# Altium PCB PCBV2-01.PcbDoc (part 2 of 2)
Units mm, origin at the board's own origin, x right, y up, seen from the top; angles counter-clockwise.
Board outline 152.4 x 101.6 mm, 2 copper layers (Top Layer, Bottom Layer); 97 components, 117 nets, 452 pads, 185 vias.
Unrouted connection lines stored in the file: 1.
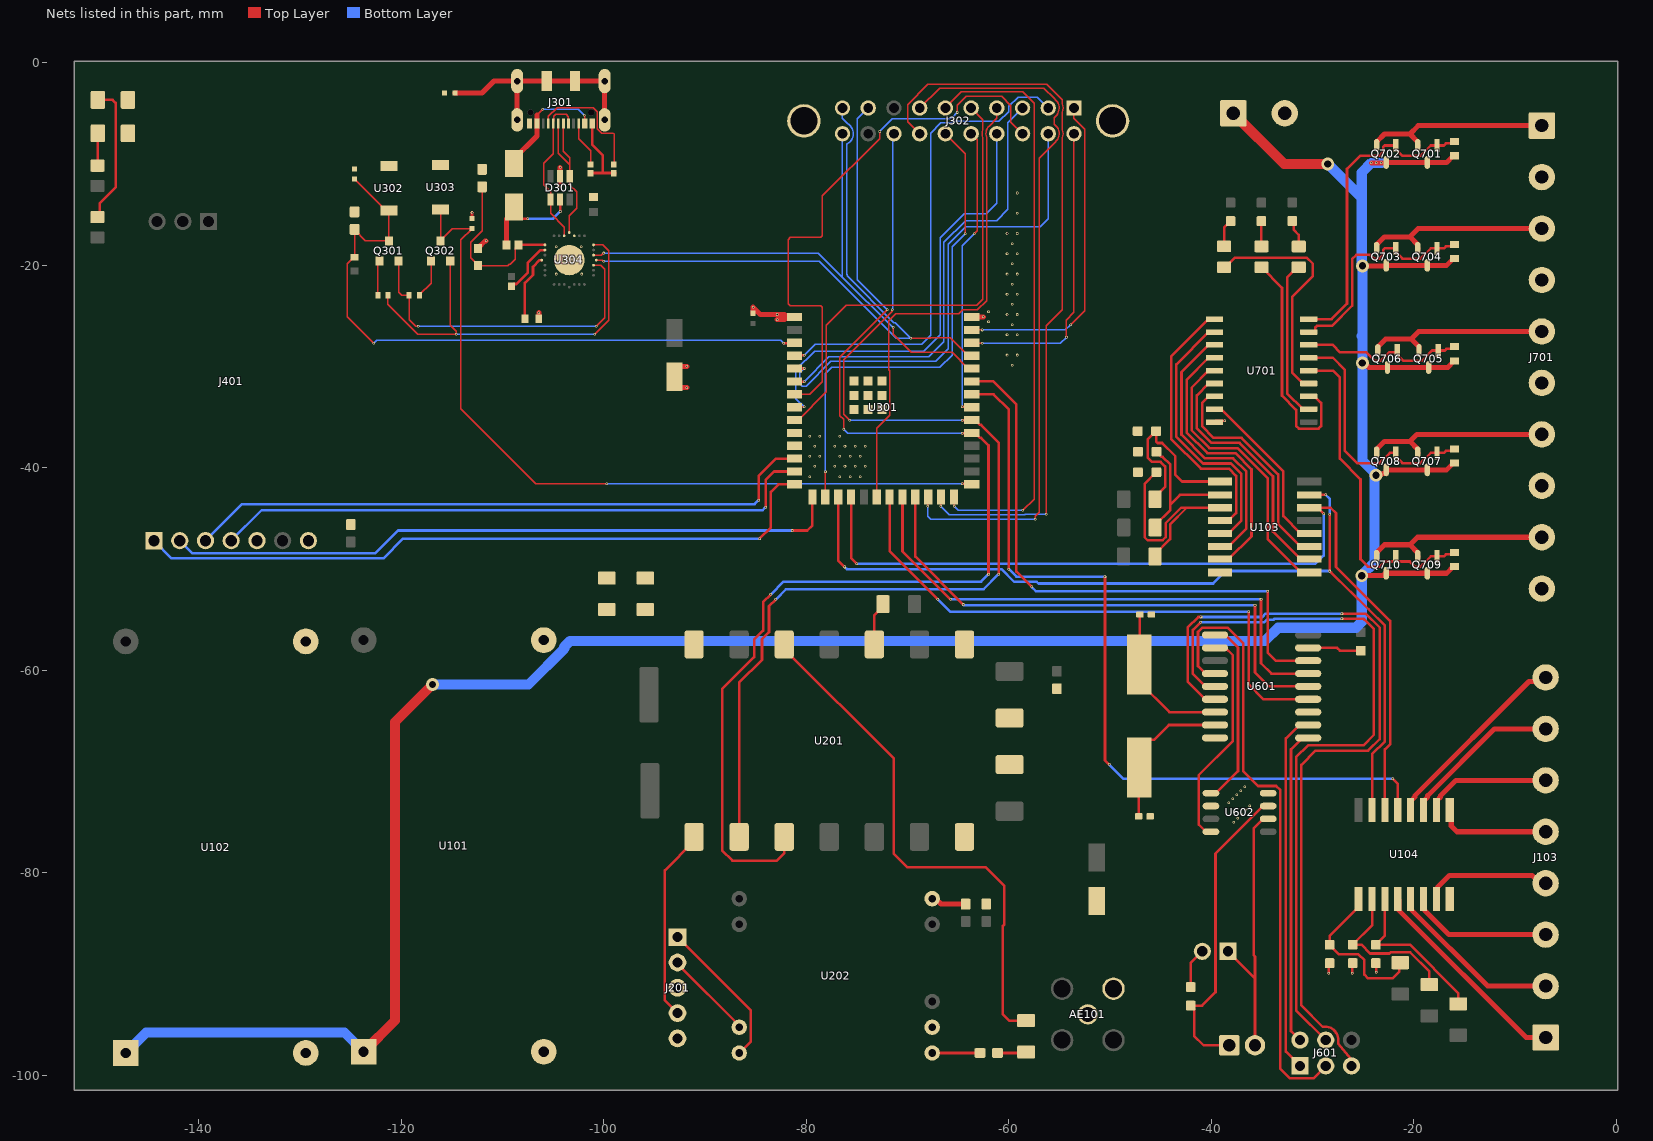
[diagram p2: the nets of this part, all layers, seen from the top]

## Via types
v1: diameter 0.254, hole 0.15, Top Layer to Bottom Layer, tented both sides, 126 vias
v2: diameter 0.254, hole 0.15, Top Layer to Bottom Layer, 46 vias
v3: diameter 1.27, hole 0.711, Top Layer to Bottom Layer, 12 vias
v4: diameter 1.27, hole 0.711, Top Layer to Bottom Layer, tented both sides, 1 vias

## Nets (pads, with @x,y where several pads share a name; then routed paths per layer and width w, separated by ;. In a path a pad name is that pad's centre, name@x,y a point inside that pad or via, vN(x,y) a via of type N, cw(c..) or ccw(c..) an arc to the next point about the centre after c; other vN are vias at no path point) (continued)
+12V: J101.1 Q701.3 Q702.3 Q703.3 Q704.3 Q705.3 Q706.3 Q707.3 Q708.3 Q709.3 Q710.3 R701.2 R702.2 R703.2 R704.2 R708.2 U101.1 U102.1 | length 267.8
  Top Layer w0.5: v3(-28.5,-10) v3@-28.426,-9.926 ; v3@-25.121,-50.648 -23.057,-50.648 -22.828,-50.419 Q710.3@-22.733,-50.419 Q709.3@-18.669,-50.419 -16.758,-50.419 -16.102,-49.763 R708.2@-16.002,-49.763 ; v3(-25.089,-29.646) -24.881,-29.646 -24.427,-30.099 Q706.3@-22.606,-30.099 Q705.3@-18.542,-30.099 -16.658,-30.099 R703.2@-16.002,-29.443 ; v3(-25.076,-20.066) -22.75,-20.066 -22.733,-20.049 Q703.3@-22.733,-20.012 Q704.3@-18.669,-20.012 -16.758,-20.012 -16.102,-19.356 R702.2@-16.002,-19.356 ; v1(-24.2,-9.9) v1(-23.7,-9.9) v1(-23.2,-9.9) -22.75,-9.9 -22.733,-9.883 Q702.3@-22.733,-9.852 Q701.3@-18.669,-9.852 -16.758,-9.852 -16.102,-9.196 R701.2@-16.002,-9.196 ; v3(-23.729,-40.747) -23.275,-40.747 -23.109,-40.581 -22.75,-40.581 -22.733,-40.565 Q708.3@-22.733,-40.205 Q707.3@-18.669,-40.205 -16.758,-40.205 -16.102,-39.549 R704.2@-16.002,-39.549
  Top Layer w1: U101.1@-123.698,-97.663 -120.611,-94.576 -120.611,-65.111 v3(-116.9,-61.4) ; J101.1@-37.83,-5 -32.83,-10 v3(-28.5,-10) ; v3(-25.146,-50.673) v3@-25.121,-50.648
  Bottom Layer w1: U102.1@-147.193,-97.79 -145.169,-95.766 -125.595,-95.766 U101.1@-123.698,-97.663 ; v3@-116.7,-61.4 -107.433,-61.4 -103.894,-57.861 -103.894,-57.686 -103.308,-57.1 -34.7,-57.1 -33.4,-55.8 -25.732,-55.8 -25.146,-55.214 v3(-25.146,-50.673) -25.146,-50.6 -23.876,-49.33 v3@-23.876,-40.894 ; v3(-28.5,-10) -25.146,-13.354 ; v3@-25.146,-20.066 -25.128,-20.048 -25.128,-19.941 -25.146,-19.923 -25.146,-13.354 ; v3(-25.089,-29.646) -25.06,-29.675 -25.06,-39.343 -23.729,-40.674 v3(-23.729,-40.747) ; v3(-25.076,-20.066) -25.076,-26.911 -25.146,-26.981 -25.06,-27.067 v3@-25.06,-29.657 ; v1(-23.2,-9.9) v1(-23.7,-9.9) v1(-24.2,-9.9) -25.146,-10.846 -25.146,-13.354
ANTENNA_LINE: AE101.1 U201.12
AUX: J401.5
CHIP_PU: C303.1 C305.1 Q301.3 R302.1 U301.3 U302.2 | length 67
  Top Layer w0.125: C305.1@-124.6,-16.463 C305.1@-124.6,-16.525 ; C303.1@-124.6,-11.5 -121.988,-14.112 -121.988,-14.162 -121.55,-14.6 U302.2@-121.2,-14.6 ; v1(-122.7,-27.7) -125.323,-25.077 -125.323,-19.869 -124.677,-19.223 R302.1@-124.6,-19.223 C305.1@-124.6,-16.525 ; U302.2@-120.413,-14.162 -120.85,-14.6 U302.2@-121.2,-14.6 ; U301.3@-81.18,-27.7 U301.3@-81.15,-27.67 ; C305.1@-124.6,-16.525 -123.525,-17.6 Q301.3@-121.2,-17.6 U302.2@-121.2,-14.6
  Top Layer w0.254: v1(-82.2,-27.7) U301.3@-81.18,-27.7
  Bottom Layer w0.125: v1(-122.7,-27.7) -122.4,-27.4 -82.5,-27.4 v1(-82.2,-27.7)
CP2102_DTR: Q302.2 R301.1 U304.28 | length 40.5
  Top Layer w0.125: R301.1@-121.3,-22.973 -121.3,-23.836 -118.336,-26.8 v1(-114.544,-26.8) -114.568,-26.775 -114.568,-26.532 -115.15,-25.95 Q302.2@-115.15,-19.6 ; U304.28@-101,-18 -100.1,-18 -99.521,-18.579 -99.521,-25.448 v1(-100.873,-26.8)
  Bottom Layer w0.125: v1(-114.544,-26.8) v1(-100.873,-26.8)
CP2102_RTS: Q301.2 R303.1 U304.24 | length 32.7
  Top Layer w0.125: Q301.2@-120.25,-19.6 -120.25,-22.65 -119.927,-22.973 R303.1@-119.208,-22.973 -119.208,-25.392 -118.577,-26.023 v1(-118.3,-26.023) ; U304.24@-101,-20 -100.3,-20 -99.9,-20.4 -99.9,-25.2 -100.723,-26.023 v1(-100.734,-26.011)
  Bottom Layer w0.125: v1(-118.3,-26.023) -118.3,-26 -118.289,-26.011 v1(-100.734,-26.011)
CP2102_RXD: J302.19 U301.37 U304.25 | length 67.1
  Top Layer w0.125: U304.25@-100.725,-19.5 -100.135,-19.5 -100.035,-19.6 v1(-100,-19.6) ; v1(-69.7,-27.2) -67.749,-27.2 -67.699,-27.15 -65.783,-27.15 -63.993,-28.94 U301.37@-63.65,-28.94
  Bottom Layer w0.125: v1(-100,-19.6) -78.7,-19.6 -71.1,-27.2 v1(-69.7,-27.2) -71.23,-25.67 -71.351,-25.67 -75.963,-21.057 -75.963,-20.937 -76,-20.9 -76,-8.041 -75.949,-7.99 ccw(c-76.42,-7.02) -75.657,-6.257 -76.037,-5.878 -76.42,-5.495 J302.19@-76.42,-4.48
CP2102_TXD: J302.20 U301.36 U304.26 | length 56.7
  Top Layer w0.125: U304.26@-101,-19 -100.235,-19 -100.035,-18.8 v1(-100,-18.8) ; v1(-71.414,-26.114) -71.4,-26.127 -71.4,-26.827 -69.627,-28.6 -65.603,-28.6 -63.993,-30.21 U301.36@-63.65,-30.21
  Bottom Layer w0.125: v1(-100,-18.8) -78.8,-18.8 -76.42,-21.18 ; J302.20@-76.42,-7.02 -76.42,-21.18 ; v1(-71.414,-26.114) -71.438,-26.089 -71.511,-26.089 -76.42,-21.18
CS: U301.35 U601.16 | length 57.9
  Top Layer w0.254: U301.35@-63.65,-31.48 -61.52,-31.48 -59.25,-33.75 -59.25,-50.25 -57.75,-51.75 v1(-57.75,-51.766) ; v1(-34.417,-52.197) -34.417,-58.283 -33.645,-59.055 U601.16@-30.435,-59.055
  Bottom Layer w0.254: v1(-57.75,-51.766) -57.319,-52.197 v1(-34.417,-52.197)
GNDA: AE101.2 C202.1 C203.1 C204.2 C205.1 J201.3 J201.5 R103.2 R104.2 U201.9 U201.10 U202.2 U202.5 | length 3.5
  Top Layer w0.5: U202.5@-67.564,-82.55 -67.22,-82.55 -66.686,-83.085 C202.1@-64.262,-83.085
GNDD: C301.2 C302.1 C303.2 C304.2 C305.2 C306.2 C307.2 C308.2 C401.2 C601.1 C602.1 D101.1 D102.1 D301.2 J101.2 J301.1 J301.12 J302.21 J302.22 J401.7 J701.2 J701.4 J701.6 J701.8 J701.10 JP101.1 JP102.1 JP103.1 JP104.1 JP105.1 JP106.1 R103.1 R104.1 R304.1 R305.1 R307.1 R309.2 U101.2 U101.3 U102.2 U102.3 U103.8 U104.8 U301.1 U301.40 U301.41 U301.42 U301.43 U301.44 U301.45 U301.46 U301.47 U301.48 U301.49 U302.1 U303.1 U304.3 U304.29 U601.9 U602.2 U602.8 U701.9 | length 27.5
  Top Layer w0.25: v1(-28.4,-89.9) JP104.1@-28.4,-88.924
  Top Layer w0.254: C304.2@-113,-15.4 v1(-113,-14.8) ; R304.1@-101.275,-10.9 -100.1,-10.9 ; J301.1@-101.125,-6.025 -101.125,-8.119 -100.1,-9.144 -100.1,-10.9 ; R305.1@-99.025,-10.9 -100.1,-10.9 ; U701.9@-39.685,-35.492 -39.537,-35.344 -38.857,-35.344 v1(-38.653,-35.344) ; v1(-26.1,-89.9) JP105.1@-26.1,-88.989 ; JP106.1@-23.749,-88.924 -23.7,-88.973 v1(-23.7,-89.8)
  Top Layer w0.5: R309.2@-112.4,-18.35 -112.4,-18.3 -111.7,-17.6 v1(-111.6,-17.6) ; R307.1@-106.423,-25.3 -106.4,-25.277 v1(-106.4,-24.7) ; v1(-104.3,-12.1) D301.2@-104.3,-11.225 v1(-104.3,-10.35) ; R304.1@-101.3,-10.925 R304.1@-101.275,-10.9 ; R305.1@-99.025,-10.9 R305.1@-99,-10.925 ; v1(-91.8,-32.1) -92.45,-32.1 -93,-31.55 C302.1@-93,-31 -93,-30.55 -92.45,-30 v1(-91.8,-30) ; C301.2@-85.25,-24.75 v1(-85.25,-24.15) -84.53,-24.87 v1(-82.866,-24.87) -82.166,-24.87 -82.062,-24.974 -81.306,-24.974 U301.1@-81.15,-25.13 -81.306,-25.286 -82.082,-25.286 -82.166,-25.37 v1(-82.866,-25.37) ; U301.40@-63.65,-25.13 -63.62,-25.1 v1(-62.5,-25.1)
  other v1: -37.8,-75 -37.4,-74.6 -37,-74.2 -36.6,-73.8 -36.2,-73.4 -38.3,-73.1 -37.9,-72.7 -37.5,-72.3 -37.1,-71.9 -36.7,-71.5 -62,-25.6 -62,-24.6 -104.7,-19.5 -103.4,-19.5 -102.2,-19.5 -104.7,-18.2 -102.2,-18.2
  other v2: -79.673,-40.873 -76.673,-40.873 -75.673,-40.873 -74.673,-40.873 -79.173,-39.873 -77.173,-39.873 -76.173,-39.873 -75.173,-39.873 -74.173,-39.873 -79.673,-38.873 -78.673,-38.873 -76.673,-38.873 -75.673,-38.873 -74.673,-38.873 -79.173,-37.873 -77.173,-37.873 -76.173,-37.873 -75.173,-37.873 -74.173,-37.873 -79.673,-36.873 -78.673,-36.873 -76.673,-36.873 -59.673,-29.873 -60.173,-28.873 -59.173,-28.873 -60.173,-26.873 -59.173,-26.873 -59.673,-25.873 -60.173,-24.873 -59.173,-24.873 -59.673,-23.873 -60.173,-22.873 -59.173,-22.873 -59.673,-21.873 -104.673,-20.873 -102.173,-20.873 -60.173,-20.873 -59.173,-20.873 -59.673,-19.873 -60.173,-18.873 -59.173,-18.873 -59.673,-17.873 -60.173,-16.873 -59.173,-16.873 -59.173,-14.873 -59.173,-12.873
GPIO0: C304.1 Q302.3 U301.27 U303.2 | length 78.5
  Top Layer w0.125: Q302.3@-116.1,-17.6 Q302.3@-116.1,-17.55 ; U303.2@-116.1,-14.5 Q302.3@-116.1,-17.55 ; v1(-99.7,-41.6) -106.7,-41.6 -114.1,-34.2 -114.1,-17.5 C304.1@-113,-16.4 -114.95,-16.4 Q302.3@-116.1,-17.55 ; U301.27@-63.69,-41.6 U301.27@-63.65,-41.64
  Top Layer w0.254: v1(-64.6,-41.6) U301.27@-63.69,-41.6
  Bottom Layer w0.125: v1(-99.7,-41.6) v1(-64.6,-41.6)
GPIO_LORA_1: J401.2 U301.15 | length 66.9
  Top Layer w0.254: v1(-81.4,-46.2) -79.9,-46.2 -79.385,-45.685 U301.15@-79.385,-42.89
  Bottom Layer w0.254: J401.2@-141.859,-47.205 -140.628,-48.436 -122.536,-48.436 -120.3,-46.2 v1(-81.4,-46.2)
GPIO_LORA_2: J401.1 U301.14 | length 69
  Top Layer w0.254: v1(-84.6,-47) -83.5,-45.9 -83.5,-42.4 -82.74,-41.64 U301.14@-81.15,-41.64
  Bottom Layer w0.254: J401.1@-144.399,-47.205 -142.66,-48.944 -121.744,-48.944 -119.8,-47 v1(-84.6,-47)
I2C_SCL_1: U103.15 U104.15 U301.17 | length 92
  Top Layer w0.254: U301.17@-76.845,-42.89 -76.845,-49.155 v1(-76.2,-49.8) ; U103.15@-30.336,-42.681 -30.327,-42.672 v1(-28.702,-42.672) ; v1(-28.321,-44.577) v1@-28.321,-50.189 ; v1(-28.3,-50.2) v1@-28.321,-50.189 ; U104.15@-24.13,-73.791 -24.13,-68.282 -22.86,-67.012 -22.86,-55.586 -24.471,-53.975 -28.172,-50.338 v1@-28.321,-50.189
  Bottom Layer w0.254: v1(-76.2,-49.8) -75.992,-50.008 -60.718,-50.008 -59.468,-51.258 -57.242,-51.258 -57.065,-51.435 -39.829,-51.435 -38.594,-50.2 v1(-28.3,-50.2) ; v1(-28.702,-42.672) -28.321,-43.053 v1(-28.321,-44.577)
I2C_SDA_1: U103.14 U104.14 U301.18 | length 92.8
  Top Layer w0.254: U301.18@-75.575,-42.89 -75.575,-48.926 v1(-75.001,-49.5) ; U103.14@-30.336,-43.951 -28.228,-43.951 -27.686,-44.494 -27.686,-49.784 -22.352,-55.118 -22.352,-67.31 -22.86,-67.818 U104.14@-22.86,-73.791 ; U103.14@-29.486,-43.951 -28.904,-44.533 v1(-28.898,-44.533)
  Bottom Layer w0.254: v1(-75.001,-49.5) -29.746,-49.5 -28.912,-48.666 -28.912,-44.547 v1(-28.898,-44.533)
IN1: U103.4 U701.1 | length 27.4
  Top Layer w0.254: U701.1@-39.685,-25.332 -40.26,-25.332 -43.964,-29.036 -43.964,-37.159 -41.031,-40.092 -38.267,-40.092 -37.555,-40.803 -37.555,-44.49 -38.286,-45.221 U103.4@-39.136,-45.221
IN2: U103.5 U701.2 | length 27.4
  Top Layer w0.254: U701.2@-39.685,-26.602 -40.26,-26.602 -43.456,-29.798 -43.456,-36.948 -40.82,-39.584 -38.056,-39.584 -37.047,-40.593 -37.047,-45.252 -38.286,-46.491 U103.5@-39.136,-46.491
IN3: U103.6 U701.3 | length 27.4
  Top Layer w0.254: U701.3@-39.685,-27.872 -40.26,-27.872 -42.948,-30.56 -42.948,-36.738 -40.61,-39.076 -37.846,-39.076 -36.539,-40.383 -36.539,-46.014 -38.286,-47.761 U103.6@-39.136,-47.761
IN4: U103.7 U701.4 | length 27.4
  Top Layer w0.254: U701.4@-39.685,-29.142 -40.26,-29.142 -42.44,-31.322 -42.44,-36.527 -40.4,-38.568 -37.635,-38.568 -36.031,-40.172 -36.031,-46.776 -38.286,-49.031 U103.7@-39.136,-49.031
IN5: U103.9 U701.5 | length 28.1
  Top Layer w0.254: U701.5@-39.685,-30.412 -40.26,-30.412 -41.932,-32.084 -41.932,-36.317 -40.189,-38.06 -37.425,-38.06 -34.417,-41.068 -34.417,-47.07 -31.136,-50.351 U103.9@-30.336,-50.351
IN6: U103.10 U701.6 | length 25.1
  Top Layer w0.254: U701.6@-39.685,-31.682 -40.26,-31.682 -41.424,-32.846 -41.424,-36.106 -39.979,-37.552 -37.215,-37.552 -33.909,-40.857 -33.909,-46.308 -31.186,-49.031 U103.10@-30.336,-49.031
IN7: U103.11 U701.7 | length 22.2
  Top Layer w0.254: U701.7@-39.685,-32.952 -40.26,-32.952 -40.916,-33.608 -40.916,-35.896 -39.768,-37.044 -37.004,-37.044 -33.401,-40.647 -33.401,-45.546 -31.186,-47.761 U103.11@-30.336,-47.761
IN8: U103.12 U701.8 | length 17
  Top Layer w0.254: U701.8@-39.685,-34.222 -39.537,-34.37 -38.909,-34.37 -32.893,-40.386 -32.893,-44.784 -31.186,-46.491 U103.12@-30.336,-46.491
INT: U601.12
IO1: J302.1 U301.39 | length 32.4
  Top Layer w0.125: U301.39@-63.65,-26.4 v1(-62.6,-26.4) ; v1(-53.9,-25.9) -52.482,-24.482 -52.482,-6.573 -53.56,-5.495 J302.1@-53.56,-4.48
  Bottom Layer w0.125: v1(-62.6,-26.4) -54.4,-26.4 v1(-53.9,-25.9)
IO2: J302.2 U301.38 | length 30
  Top Layer w0.125: U301.38@-63.65,-27.67 -63.62,-27.7 v1(-62.6,-27.7) ; v1(-54.3,-27.1) -54.3,-27.065 -54.344,-27.022 -54.344,-25.444 -53.56,-24.66 J302.2@-53.56,-7.02
  Bottom Layer w0.125: v1(-62.6,-27.7) -54.9,-27.7 v1(-54.3,-27.1)
IO4: J302.3 U301.4 | length 48.1
  Top Layer w0.254: U301.4@-81.15,-28.94 -81.11,-28.9 v1(-80.2,-28.9)
  Bottom Layer w0.125: v1(-80.2,-28.9) -79.1,-27.8 -68.6,-27.8 -67.722,-26.922 -67.722,-16.422 -67.722,-6.956 -66.703,-5.938 -65.656,-5.938 -65.517,-5.798 -60.973,-5.798 -60.006,-4.831 -60.006,-4.321 -59.087,-3.401 -57.179,-3.401 J302.3@-56.1,-4.48
IO5: J302.4 U301.5 | length 48.6
  Top Layer w0.254: U301.5@-81.15,-30.21 -81.14,-30.2 v1(-80.2,-30.2)
  Bottom Layer w0.125: v1(-80.2,-30.2) -80.644,-30.644 -80.644,-31.684 -80.384,-31.944 -80.016,-31.944 -77.573,-29.5 -67.2,-29.5 -65.956,-28.256 -65.956,-17.929 -64.227,-16.2 -56.9,-16.2 -56.1,-15.4 J302.4@-56.1,-7.02
IO6: J302.5 U301.6 | length 44.5
  Top Layer w0.254: U301.6@-81.15,-31.48 -81.13,-31.5 v1(-80.2,-31.5)
  Bottom Layer w0.125: v1(-80.2,-31.5) -77.756,-29.056 -67.879,-29.056 -66.4,-27.577 -66.4,-17.746 -64.254,-15.6 -61.2,-15.6 -60.102,-14.502 -60.102,-11.1 -60.102,-5.941 J302.5@-58.64,-4.48
IO7: J302.6 U301.7 | length 55.1
  Top Layer w0.125: U301.7@-81.15,-32.75 -79.65,-32.75 -78.4,-31.5 -78.4,-24.163 -78.549,-24.015 -81.562,-24.015 -81.785,-23.791 -81.785,-17.481 -81.562,-17.258 -78.549,-17.258 -78.4,-17.109 -78.4,-13.156 -72.737,-7.493 v1(-72.737,-6.801) ; v1(-65.085,-4.922) -65.085,-4.229 -64.193,-3.337 -60.707,-3.337 -59.795,-4.249 -59.795,-5.865 J302.6@-58.64,-7.02
  Bottom Layer w0.125: v1(-72.737,-6.801) -71.495,-5.559 -65.813,-5.559 -65.674,-5.419 -65.582,-5.419 v1(-65.085,-4.922)
IO12: J302.7 U301.20 | length 47.9
  Top Layer w0.125: U301.20@-73.035,-42.89 -73.035,-36.122 -71.739,-34.826 -71.739,-30.437 -71.857,-30.319 -71.857,-25.493 -71.164,-24.8 -64.923,-24.8 -64.53,-24.407 -63.094,-24.407 -62.198,-23.511 -62.198,-7.376 cw(c-61.18,-7.02) -61.944,-6.259 -61.18,-5.495 J302.7@-61.18,-4.48
IO15: J302.8 U301.8 | length 44.1
  Top Layer w0.125: U301.8@-81.15,-34.02 -81.13,-34 v1(-80.2,-34)
  Bottom Layer w0.125: v1(-80.2,-34) -81.023,-33.177 -81.023,-30.35 -79.173,-28.5 -68.4,-28.5 -66.779,-26.879 -66.779,-17.279 -64.4,-14.9 -62.2,-14.9 -61.18,-13.88 J302.8@-61.18,-7.02
IO16: J302.9 U301.9 | length 46.7
  Top Layer w0.125: U301.9@-81.15,-35.29 -80.807,-35.29 -78.021,-32.504 -78.021,-25.921 -76.05,-23.95 -63.173,-23.95 -62.577,-23.354 -62.577,-7.436 cw(c-61.18,-7.02) -62.577,-6.604 -62.577,-5.623 J302.9@-63.72,-4.48
IO40: J302.10 U301.33 | length 28.8
  Top Layer w0.125: J302.10@-63.72,-7.02 -63.1,-7.64 -63.1,-16.6 v1(-63.4,-16.9) ; U301.33@-63.67,-34 U301.33@-63.65,-34.02
  Top Layer w0.254: v1(-64.6,-34) U301.33@-63.67,-34
  Bottom Layer w0.125: v1(-64.6,-34) -64.6,-18.1 v1(-63.4,-16.9)
IO45: J302.11 U301.26 | length 58.4
  Top Layer w0.125: J302.11@-66.26,-4.48 -64.674,-2.893 -58.61,-2.893 -57.497,-4.007 -57.497,-43.097 v1(-58.6,-44.2) ; U301.26@-65.415,-42.89 -65.4,-42.905 v1(-65.4,-43.8)
  Bottom Layer w0.125: v1(-65.4,-43.8) -65,-44.2 v1(-58.6,-44.2)
IO46: J302.12 U301.16 | length 48.7
  Top Layer w0.125: U301.16@-78.115,-42.89 -78.1,-42.875 v1(-78.1,-40.4) ; J302.12@-66.26,-7.02 -64.3,-8.98 v1(-64.3,-16.9)
  Bottom Layer w0.125: v1(-78.1,-40.4) -78.1,-30.7 -77.5,-30.1 -66.8,-30.1 -65.577,-28.877 -65.577,-18.177 v1(-64.3,-16.9)
IO47: J302.13 U301.24 | length 70.1
  Top Layer w0.125: J302.13@-68.8,-4.48 -66.835,-2.514 -56.54,-2.514 -55.534,-3.521 -55.341,-3.714 -55.34,-3.715 cw(c-56.1,-4.48) -55.277,-5.177 -55.5,-5.441 -55.5,-6.059 -55.5,-6.095 -55.337,-6.257 cw(c-56.1,-7.02) -55.422,-7.858 -55.463,-7.892 -57,-9.429 -57,-44.4 -57.369,-44.769 -57.369,-45.062 v1(-57.394,-45.087) ; v1(-68,-43.8) -68,-42.935 U301.24@-67.955,-42.89
  Bottom Layer w0.125: v1(-68,-43.8) -68,-44.8 -67.7,-45.1 -57.407,-45.1 v1(-57.394,-45.087)
IO48: J302.14 U301.25 | length 73.4
  Top Layer w0.125: J302.14@-68.8,-7.02 -70,-5.82 -70,-4.155 -67.981,-2.135 -56.249,-2.135 -54.7,-3.685 -54.7,-4.075 cw(c-56.1,-4.48) -54.7,-4.885 -54.7,-6.615 cw(c-56.1,-7.02) -54.7,-7.425 -54.7,-24.385 -56.3,-25.985 v1(-56.3,-44.6) ; v1(-66.7,-43.8) -66.7,-42.905 U301.25@-66.685,-42.89
  Bottom Layer w0.125: v1(-66.7,-43.8) -65.856,-44.644 -58.416,-44.644 -58.373,-44.6 v1(-56.3,-44.6)
MISO: U301.22 U601.15 | length 54.1
  Top Layer w0.254: U301.22@-70.495,-42.89 -70.495,-48.255 v1(-65.75,-53) ; v1(-35.093,-53) -35.093,-59.307 -34.075,-60.325 U601.15@-30.435,-60.325
  Bottom Layer w0.254: v1(-65.75,-53) v1(-35.093,-53)
MOSI: U301.23 U601.14 | length 53.9
  Top Layer w0.254: U301.23@-69.225,-42.89 -69.225,-48.783 v1(-64.5,-53.508) ; v1(-35.687,-53.594) -35.687,-60.213 -34.305,-61.595 U601.14@-30.435,-61.595
  Bottom Layer w0.254: v1(-64.5,-53.508) -64.492,-53.508 -64.406,-53.594 v1(-35.687,-53.594)
NetC201_1: C201.1 JP201.2 | length 2.9
  Top Layer w0.254: C201.1@-61.114,-97.79 -58.394,-97.79 JP201.2@-58.293,-97.689
NetC201_2: C201.2 U202.1 | length 4.7
  Top Layer w0.254: U202.1@-67.564,-97.79 C201.2@-62.838,-97.79
NetC306_1: C306.1 J301.S1 J301.S2 J301.S3 J301.S4 J301.S5 J301.S6 | length 22.9
  Top Layer w0.5: C306.1@-114.7,-3 -112.005,-3 -110.83,-1.825 J301.S6@-108.545,-1.825 ; J301.S4@-108.545,-5.65 J301.S6@-108.545,-1.825 ; J301.S3@-99.905,-5.65 J301.S5@-99.905,-1.825 J301.S1@-102.825,-1.825 J301.S2@-105.625,-1.825 J301.S6@-108.545,-1.825
NetC308_1: C308.1 R308.2 R309.1 U304.8 | length 16.6
  Top Layer w0.125: C308.1@-112,-12.263 -112,-16.6 -113.117,-17.716 -113.117,-19.283 -112.4,-20 R309.1@-112.4,-20.05 -109.451,-20.05 -109.335,-19.933 -109.233,-19.933 -108.739,-19.439 -108.739,-18.341 R308.2@-108.399,-18
  Top Layer w0.254: R308.2@-108.399,-18 U304.8@-105.8,-18
NetC601_2: C601.2 U601.7 Y601.1 | length 15.4
  Top Layer w0.254: C601.2@-47.049,-54.483 -47.049,-59.361 Y601.1@-47.117,-59.428 -47.117,-61.168 -44.15,-64.135 U601.7@-39.635,-64.135
NetC602_2: C602.2 U601.8 Y601.2 | length 15
  Top Layer w0.254: C602.2@-47.176,-74.422 -47.176,-69.663 Y601.2@-47.117,-69.604 -47.117,-67.967 -46.028,-66.878 -45.669,-66.878 -44.196,-65.405 U601.8@-39.635,-65.405
NetD101_2: D101.2 R101.2 | length 13.9
  Top Layer w0.254: R101.2@-149.987,-15.256 -149.778,-15.047 -149.778,-13.906 -148.195,-12.323 -148.195,-3.976 -148.488,-3.683 D101.2@-149.951,-3.683
NetD102_2: D102.2 R102.2 | length 3.2
  Top Layer w0.254: R102.2@-149.987,-10.176 -149.974,-10.163 -149.974,-7.008 D102.2@-149.951,-6.985
NetD302_1: D302.1 J301.2 J301.11 | length 11.7
  Top Layer w0.125: -106.565,-5.165 v1(-106,-4.6) ; v1(-101.9,-5.2) -101.885,-5.215 -101.885,-6.015 J301.2@-101.875,-6.025
  Top Layer w0.5: D302.1@-108.85,-9.95 -108.85,-9.5 -106.585,-7.235 -106.585,-6.035 J301.11@-106.575,-6.025 -106.565,-6.015 -106.565,-5.165
  Bottom Layer w0.125: v1(-106,-4.6) -102.5,-4.6 v1(-101.9,-5.2)
NetJ103_1: J103.1 U104.4 | length 20.9
  Top Layer w0.5: U104.4@-21.59,-82.591 -21.49,-82.691 -21.49,-83.684 -8.908,-96.266 J103.1@-6.985,-96.266
NetJ103_2: J103.2 U104.5 | length 17.5
  Top Layer w0.5: U104.5@-20.32,-82.591 -20.22,-82.691 -20.22,-83.684 -12.718,-91.186 J103.2@-6.985,-91.186
NetJ103_3: J103.3 U104.6 | length 14.1
  Top Layer w0.5: U104.6@-19.05,-82.591 -18.95,-82.691 -18.95,-83.684 -16.528,-86.106 J103.3@-6.985,-86.106
NetJ103_4: J103.4 U104.7 | length 12.7
  Top Layer w0.5: U104.7@-17.78,-82.591 -17.68,-82.491 -17.68,-81.45 -16.494,-80.264 -8.315,-80.264 -7.553,-81.026 J103.4@-6.985,-81.026
NetJ103_5: J103.5 U104.9 | length 11.2
  Top Layer w0.5: U104.9@-16.46,-73.791 -16.31,-73.941 -16.31,-75.384 -15.748,-75.946 J103.5@-6.985,-75.946
NetJ103_6: J103.6 U104.10 | length 12.6
  Top Layer w0.5: U104.10@-17.78,-73.791 -17.68,-73.691 -17.68,-72.841 -17.364,-72.525 -17.364,-72.382 -15.848,-70.866 J103.6@-6.985,-70.866
NetJ103_7: J103.7 U104.11 | length 16
  Top Layer w0.5: U104.11@-19.05,-73.791 -18.95,-73.691 -18.95,-72.841 -18.634,-72.525 -18.634,-72.382 -12.038,-65.786 J103.7@-6.985,-65.786
NetJ103_8: J103.8 U104.12 | length 19.3
  Top Layer w0.5: U104.12@-20.32,-73.791 -20.22,-73.691 -20.22,-72.841 -19.904,-72.525 -19.904,-72.382 -8.63,-61.108 -7.387,-61.108 J103.8@-6.985,-60.706
NetJ201_1: J201.1 U202.9 | length 14.9
  Top Layer w0.254: J201.1@-92.71,-86.353 -85.471,-93.592 -85.471,-96.647 U202.9@-86.614,-97.79
NetJ201_2: J201.2 U202.8 | length 8.9
  Top Layer w0.254: J201.2@-92.71,-88.853 -92.71,-89.003 -86.614,-95.099 U202.8@-86.614,-95.25
NetJ201_4: J201.4 U201.18 | length 19.1
  Top Layer w0.254: J201.4@-92.71,-93.853 -93.966,-92.597 -93.966,-79.771 -91.074,-76.879 U201.18@-91.074,-76.454
NetJ202_1: U201.7
NetJ202_2: R201.2 U201.5 | length 4.3
  Top Layer w0.254: U201.5@-73.274,-57.454 -73.274,-54.55 -72.416,-53.692 R201.2@-72.416,-53.467
NetJ301_3: J301.3 R304.2 | length 4.5
  Top Layer w0.125: J301.3@-102.475,-6.025 -102.475,-7.526 -101.3,-8.701 R304.2@-101.3,-10.075
NetJ301_9: J301.9 R305.2 | length 12.7
  Top Layer w0.125: J301.9@-105.475,-6.025 -105.475,-5.314 -104.608,-4.447 -101.027,-4.447 -100.646,-4.828 -100.646,-6.536 -100.212,-6.971 -99.049,-6.971 -98.976,-7.044 -98.976,-10.051 R305.2@-99,-10.075
NetJ601_1: J601.1 U601.11 | length 35.7
  Top Layer w0.254: J601.1@-31.242,-99.06 -32.639,-97.663 -32.639,-66.741 -31.303,-65.405 U601.11@-30.435,-65.405
NetJ601_2: J601.2 U601.10 | length 31.2
  Top Layer w0.254: J601.2@-31.242,-96.52 -32.131,-95.631 -32.131,-67.803 -31.003,-66.675 U601.10@-30.435,-66.675
NetJ601_3: J601.3 U601.4 | length 60.6
  Top Layer w0.254: U601.4@-39.635,-60.325 -40.585,-60.325 -41.316,-59.594 -41.316,-56.212 -40.888,-55.784 -38.382,-55.784 -36.83,-57.336 -36.83,-69.977 -35.377,-71.43 -33.594,-71.43 -33.18,-71.844 -33.18,-99.361 -32.25,-100.291 -29.933,-100.291 J601.3@-28.702,-99.06
NetJ601_4: J601.4 U601.5 | length 73.9
  Top Layer w0.254: v1@-41.084,-55.262 -41.824,-56.002 -41.824,-60.356 -40.585,-61.595 U601.5@-39.635,-61.595 ; J601.4@-28.702,-96.52 -31.623,-93.599 -31.623,-68.58 -30.449,-67.406 -24.988,-67.406 -23.95,-66.368 -23.95,-55.933 -24.892,-54.991 -24.964,-54.919 v1(-27.1,-54.919)
  Bottom Layer w0.254: v1(-41.045,-55.245) -34.758,-55.245 -34.504,-54.991 -33.837,-54.991 -33.765,-54.919 v1(-27.1,-54.919)
NetJ601_5: J601.5 U601.6 | length 80.8
  Top Layer w0.254: v1(-41.021,-54.737) -41.278,-54.737 -42.332,-55.791 -42.332,-61.118 -40.585,-62.865 U601.6@-39.635,-62.865 ; v1(-27.1,-54.411) -24.754,-54.411 -23.368,-55.797 -23.368,-66.802 -24.511,-67.945 -29.718,-67.945 -31.115,-69.342 -31.115,-93.09 -29.006,-95.199 -28.89,-95.199 -28.774,-95.191 cw(c-28.785,-96.506) -27.487,-96.72 -27.487,-96.846 -25.98,-98.682 -25.98,-98.878 J601.5@-26.162,-99.06
  Bottom Layer w0.254: v1(-41.021,-54.737) -34.969,-54.737 -34.643,-54.411 v1(-27.1,-54.411)
NetJ602_1: J602.1 J603.2 U602.6 | length 27.1
  Top Layer w0.254: J602.1@-38.35,-87.75 -35.687,-90.413 ; J603.2@-35.687,-97.028 -35.687,-90.413 ; U602.6@-34.386,-74.676 -34.886,-74.676 -35.814,-75.604 -35.814,-88.138 -35.687,-88.265 -35.687,-90.413
NetJ602_2: J602.2 R601.1 | length 4
  Top Layer w0.254: R601.1@-42.037,-91.289 -42.037,-88.897 J602.2@-40.89,-87.75
NetJ603_1: J603.1 R601.2 U602.7 | length 30.8
  Top Layer w0.254: J603.1@-38.227,-97.028 -40.767,-97.028 -41.689,-96.106 -41.689,-93.463 R601.2@-42.037,-93.115 -40.918,-93.115 -39.585,-91.782 -39.585,-78.105 -34.886,-73.406 U602.7@-34.386,-73.406
NetJ701_1: J701.1 Q701.2 Q702.2 | length 18.8
  Top Layer w0.5: Q702.2@-23.683,-8.182 -23.671,-8.17 -23.671,-7.801 -22.911,-7.041 -20.391,-7.041 ; Q701.2@-19.619,-8.182 -19.631,-8.17 -19.631,-7.801 -20.391,-7.041 ; J701.1@-7.366,-6.223 -19.573,-6.223 -20.391,-7.041
NetJ701_3: J701.3 Q703.2 Q704.2 | length 18.8
  Top Layer w0.5: Q703.2@-23.683,-18.342 -23.671,-18.33 -23.671,-17.961 -22.911,-17.201 -20.391,-17.201 ; Q704.2@-19.619,-18.342 -19.631,-18.33 -19.631,-17.961 -20.391,-17.201 ; J701.3@-7.366,-16.383 -19.573,-16.383 -20.391,-17.201
NetJ701_5: J701.5 Q705.2 Q706.2 | length 18.6
  Top Layer w0.5: Q706.2@-23.556,-28.429 -23.544,-28.417 -23.544,-28.048 -22.784,-27.288 -20.264,-27.288 ; Q705.2@-19.492,-28.429 -19.504,-28.417 -19.504,-28.048 -20.264,-27.288 ; J701.5@-7.366,-26.543 -19.519,-26.543 -20.264,-27.288
NetJ701_7: J701.7 Q707.2 Q708.2 | length 18.8
  Top Layer w0.5: Q708.2@-23.683,-38.535 -23.671,-38.523 -23.671,-38.154 -22.911,-37.394 -20.391,-37.394 ; Q707.2@-19.619,-38.535 -19.631,-38.523 -19.631,-38.154 -20.391,-37.394 ; J701.7@-7.366,-36.703 -19.7,-36.703 -20.391,-37.394
NetJ701_9: J701.9 Q709.2 Q710.2 | length 18.8
  Top Layer w0.5: Q710.2@-23.683,-48.749 -23.671,-48.737 -23.671,-48.368 -22.911,-47.608 -20.391,-47.608 ; Q709.2@-19.619,-48.749 -19.631,-48.737 -19.631,-48.368 -20.391,-47.608 ; J701.9@-7.366,-46.863 -19.646,-46.863 -20.391,-47.608
NetJP101_2: JP101.2 R113.2 U103.1 | length 18.8
  Top Layer w0.254: R113.2@-45.55,-43.112 -45.55,-42.887 -44.557,-41.894 -44.557,-39.882 -45.01,-39.429 -45.841,-39.429 -46.294,-38.976 -46.294,-37.214 -45.462,-36.381 JP101.2@-45.449,-36.381 -45.449,-37.408 -45.3,-37.557 -44.85,-37.557 -43.541,-38.866 -43.541,-40.702 -42.882,-41.361 U103.1@-39.136,-41.361
NetJP102_2: JP102.2 R112.2 U103.2 | length 14.1
  Top Layer w0.254: R112.2@-45.55,-45.906 -45.55,-45.681 -44.049,-44.18 -44.049,-43.617 ; JP102.2@-45.426,-38.413 -45.413,-38.413 -44.905,-38.921 -44.799,-38.921 -44.049,-39.672 -44.049,-43.617 ; U103.2@-39.136,-42.681 -43.113,-42.681 -44.049,-43.617
NetJP103_2: JP103.2 R111.2 U103.3 | length 22.7
  Top Layer w0.254: R111.2@-45.567,-48.768 -45.567,-48.543 -44.069,-47.045 -44.069,-45.593 -42.427,-43.951 ; JP103.2@-45.426,-40.445 -45.438,-40.445 -46.581,-41.588 -46.581,-46.867 -46.286,-47.162 -44.815,-47.162 -44.519,-46.867 -44.519,-45.484 -42.986,-43.951 -42.427,-43.951 ; U103.3@-39.136,-43.951 -42.427,-43.951
NetJP104_2: JP104.2 R110.2 U104.1 | length 16
  Top Layer w0.254: U104.1@-25.45,-82.591 -25.45,-83.391 -25.723,-83.664 -25.755,-83.664 -28.321,-86.23 JP104.2@-28.321,-87.098 -28.321,-87.111 -27.387,-88.045 -25.482,-88.045 -24.897,-88.63 -24.897,-90.038 -24.511,-90.424 -22.098,-90.424 -21.43,-89.756 -21.43,-88.968 R110.2@-21.336,-88.874
NetJP105_2: JP105.2 R109.2 U104.2 | length 15.3
  Top Layer w0.254: U104.2@-24.13,-82.591 -24.13,-85.181 -26.035,-87.086 JP105.2@-26.035,-87.098 -26.033,-87.1 -25.179,-87.1 -24.312,-87.967 -22.42,-87.967 -22.296,-87.843 -20.376,-87.843 -18.479,-89.74 R109.2@-18.479,-91.033
NetJP106_2: JP106.2 R108.2 U104.3 | length 16
  Top Layer w0.254: U104.3@-22.86,-82.591 -22.86,-86.197 -23.749,-87.086 JP106.2@-23.749,-87.098 -20.402,-87.098 -15.621,-91.879 R108.2@-15.621,-92.938
NetJP201_1: JP201.1 U201.3 | length 52.7
  Top Layer w0.254: U201.3@-82.174,-57.454 -82.174,-57.879 -71.374,-68.679 -71.374,-78.105 -70.037,-79.442 -62.29,-79.442 -60.444,-81.288 -60.444,-85.113 -60.579,-85.248 -60.579,-93.98 -59.97,-94.589 JP201.1@-58.293,-94.589
NetLED701_1: LED701.1 U701.13 | length 23.1
  Top Layer w0.254: LED701.1@-38.735,-20.193 -38.61,-20.193 -37.663,-19.246 -30.585,-19.246 -29.972,-19.859 -29.972,-21.082 -32.004,-23.114 -32.004,-30.638 -30.96,-31.682 U701.13@-30.385,-31.682
NetLED701_2: LED701.2 R705.1 | length 2.8
  Top Layer w0.254: LED701.2@-38.735,-18.143 -38.735,-16.292 -38.1,-15.657 R705.1@-38.1,-15.645
NetLED702_1: LED702.1 U701.12 | length 23.6
  Top Layer w0.254: LED702.1@-35.052,-20.202 -33.02,-22.234 -33.02,-32.881 -31.616,-34.285 -31.616,-35.896 -31.364,-36.148 -29.406,-36.148 -29.154,-35.896 -29.154,-33.608 -29.81,-32.952 U701.12@-30.385,-32.952
NetLED702_2: LED702.2 R706.1 | length 2.5
  Top Layer w0.254: LED702.2@-35.052,-18.152 R706.1@-35.052,-15.645
NetLED703_1: LED703.1 U701.11 | length 15.8
  Top Layer w0.254: LED703.1@-31.369,-20.202 -31.494,-20.202 -32.512,-21.22 -32.512,-32.67 -30.96,-34.222 U701.11@-30.385,-34.222
NetLED703_2: LED703.2 R707.1 | length 2.8
  Top Layer w0.254: R707.1@-32.004,-15.645 -31.854,-15.794 -31.854,-16.513 -31.369,-16.998 LED703.2@-31.369,-18.152
NetQ301_1: Q301.1 R301.2 | length 3.4
  Top Layer w0.125: R301.2@-122.3,-22.973 -122.3,-19.75 Q301.1@-122.15,-19.6
NetQ302_1: Q302.1 R303.2 | length 3.9
  Top Layer w0.125: R303.2@-118.208,-22.973 -118.208,-22.923 -117.05,-21.766 Q302.1@-117.05,-19.6
NetQ701_1: Q701.1 Q702.1 R701.1 U701.18 | length 30.8
  Top Layer w0.254: U701.18@-30.385,-25.332 -28.135,-25.332 -26.6,-23.797 -26.6,-10.5 -25.3,-9.2 -23.414,-9.2 -23.034,-8.82 -23.034,-8.331 -22.885,-8.182 Q702.1@-21.783,-8.182 -21.783,-8.551 -21.134,-9.2 -19.35,-9.2 -18.332,-8.182 Q701.1@-17.719,-8.182 -17.033,-8.182 -16.833,-7.982 -16.188,-7.982 R701.1@-16.002,-7.796
NetQ703_1: Q703.1 Q704.1 R702.1 U701.17 | length 22.1
  Top Layer w0.254: U701.17@-30.385,-26.602 -29.871,-26.602 -29.723,-26.454 -29.723,-26.137 -29.575,-25.988 -28.072,-25.988 -26.092,-24.008 -26.092,-19.392 -25.68,-18.98 -24.332,-18.98 -23.952,-19.36 -23.414,-19.36 -23.034,-18.98 -23.034,-18.491 -22.885,-18.342 Q703.1@-21.783,-18.342 ; Q703.1@-21.783,-18.711 -21.134,-19.36 -19.35,-19.36 -18.332,-18.342 Q704.1@-17.719,-18.342 -17.033,-18.342 -16.833,-18.142 -16.188,-18.142 R702.1@-16.002,-17.956
NetQ705_1: Q705.1 Q706.1 R703.1 U701.16 | length 16.3
  Top Layer w0.254: U701.16@-30.385,-27.872 -27.999,-27.872 -27.271,-28.6 -24.698,-28.6 -23.851,-29.447 -23.287,-29.447 -22.44,-28.6 -21.797,-28.6 -21.656,-28.459 Q706.1@-21.656,-28.429 ; Q706.1@-21.656,-28.798 -21.007,-29.447 -19.223,-29.447 -18.205,-28.429 Q705.1@-17.592,-28.429 -16.943,-28.429 -16.781,-28.266 -16.225,-28.266 R703.1@-16.002,-28.043
NetQ707_1: Q707.1 Q708.1 R704.1 U701.15 | length 25
  Top Layer w0.254: U701.15@-30.385,-29.142 -28.008,-29.142 -26.807,-30.343 -26.807,-38.344 -25.598,-39.553 -23.388,-39.553 -22.37,-38.535 Q708.1@-21.783,-38.535 -21.783,-38.904 -21.134,-39.553 -19.35,-39.553 -18.332,-38.535 Q707.1@-17.719,-38.535 -17.033,-38.535 -16.833,-38.335 -16.188,-38.335 R704.1@-16.002,-38.149
NetQ709_1: Q709.1 Q710.1 R708.1 U701.14 | length 33.2
  Top Layer w0.254: U701.14@-30.385,-30.412 -28.008,-30.412 -27.315,-31.105 -27.315,-39.106 -25.273,-41.148 -25.273,-49.022 -24.528,-49.767 -23.368,-49.767 -22.86,-49.259 -21.924,-49.259 Q710.1@-21.783,-49.118 ; Q710.1@-21.783,-48.749 Q710.1@-21.783,-49.118 ; R708.1@-16.002,-48.363 -16.188,-48.549 -16.833,-48.549 -17.033,-48.749 Q709.1@-17.719,-48.749 -18.332,-48.749 -19.121,-49.538 -19.35,-49.767 -19.907,-49.767 -20.415,-49.259 -21.642,-49.259 Q710.1@-21.783,-49.118
NetR306_1: R306.1 U304.9 | length 5.3
  Top Layer w0.254: R306.1@-109.1,-22.079 -109.1,-22.069 -108.891,-21.86 -108.606,-21.86 -107.487,-20.742 -107.487,-19.741 -106.254,-18.508 U304.9@-105.875,-18.508
NetR307_2: R307.2 U304.11 | length 6.6
  Top Layer w0.254: R307.2@-107.777,-25.3 -107.777,-21.749 -106.979,-20.952 -106.979,-20.161 -106.322,-19.503 -106.128,-19.503 U304.11@-106.125,-19.5
NetR602_1: R602.1 U601.17 | length 5.3
  Top Layer w0.254: U601.17@-30.435,-57.785 -27.577,-57.785 -27.292,-58.071 R602.1@-25.238,-58.071
NetU201_1: U201.1
NetU601_1: U601.1 U602.1 | length 18.6
  Top Layer w0.254: U602.1@-40.036,-72.136 -39.536,-72.136 -37.364,-69.964 -37.364,-57.754 -38.603,-56.515 U601.1@-39.635,-56.515
NetU601_2: U601.2 U602.4 | length 21.7
  Top Layer w0.254: U602.4@-40.036,-75.946 -40.536,-75.946 -41.242,-75.24 -41.242,-70.348 -37.872,-66.978 -37.872,-58.516 -38.603,-57.785 U601.2@-39.635,-57.785
PCF_INT: U104.13 U301.34 | length 80.4
  Top Layer w0.254: U301.34@-63.65,-32.75 -61.5,-32.75 -60,-34.25 v1@-60,-50 ; v1(-50.5,-50.75) -50.5,-68.9 v1(-50.1,-69.3) ; v1(-22.1,-70.7) -21.59,-71.21 U104.13@-21.59,-73.791
  Bottom Layer w0.254: v1(-60,-50.008) -59.258,-50.75 v1(-50.5,-50.75) ; v1(-50.1,-69.3) -48.7,-70.7 v1(-22.1,-70.7)
SCK: U301.21 U601.13 | length 56.9
  Top Layer w0.254: U301.21@-71.765,-42.89 -71.765,-48.235 v1(-67,-53) ; v1(-36.322,-54.229) -36.322,-61.378 -34.835,-62.865 U601.13@-30.435,-62.865
  Bottom Layer w0.254: v1(-67,-53) -65.771,-54.229 v1(-36.322,-54.229)
UART1_RX: U301.11
UART1_TX: U301.10
UART2_RX: J302.16 U201.17 U301.32 | length 107.2
  Top Layer w0.125: v1(-75.7,-35.3) -76.3,-34.7 -76.3,-29.321 -71.517,-24.537 -71.517,-24.418 v1(-71.492,-24.394)
  Top Layer w0.254: U201.17@-86.624,-76.454 -86.624,-61.224 -84.37,-58.97 -84.37,-56.925 -83.673,-56.228 -83.673,-53.673 v1(-83,-53) ; v1(-64.6,-35.3) -63.66,-35.3 U301.32@-63.65,-35.29 -63.307,-35.29 -62.825,-35.773 -62.743,-35.773 -61,-37.515 v1(-61,-50.516)
  Bottom Layer w0.125: v1(-75.7,-35.3) v1(-64.6,-35.3) ; v1(-71.492,-24.394) -71.467,-24.369 -71.467,-7.147 J302.16@-71.34,-7.02
  Bottom Layer w0.254: v1(-83,-53) -82,-52 -62.484,-52 v1(-61,-50.516)
UART2_TX: J302.17 U201.16 U301.31 | length 121.3
  Top Layer w0.125: v1(-76.3,-36.2) -76.3,-35.236 -76.679,-34.857 -76.679,-29.073 v1(-72,-24.394)
  Top Layer w0.254: v1(-83.5,-52.5) -84.25,-53.25 -84.25,-56.087 -85.141,-56.978 -85.141,-58.695 -88.3,-61.855 -88.3,-77.8 -87.3,-78.8 -82.9,-78.8 -82.174,-78.074 U201.16@-82.174,-76.454 ; v1(-64.6,-36.6) -63.69,-36.6 U301.31@-63.65,-36.56 -63.307,-36.56 -62.825,-37.043 -62.743,-37.043 -62,-37.785 v1(-62,-50.516)
  Bottom Layer w0.125: v1(-76.3,-36.2) -75.9,-36.6 v1(-64.6,-36.6) ; J302.17@-73.88,-4.48 -74.959,-5.559 -74.959,-21.435 v1(-72,-24.394)
  Bottom Layer w0.254: v1(-83.5,-52.5) -82.25,-51.25 -62.734,-51.25 v1(-62,-50.516)
UART6_RX: J401.4 U301.13 | length 60
  Top Layer w0.254: v1(-84.008,-43.9) -84.008,-42.19 -84,-42.182 -84,-41.2 -83.17,-40.37 U301.13@-81.15,-40.37
  Bottom Layer w0.254: J401.4@-136.779,-47.205 -133.774,-44.2 -84.308,-44.2 v1(-84.008,-43.9)
UART6_TX: J401.3 U301.12 | length 62.9
  Top Layer w0.254: v1(-84.7,-43.2) -84.7,-40.8 -83,-39.1 U301.12@-81.15,-39.1
  Bottom Layer w0.254: J401.3@-139.319,-47.205 -135.714,-43.6 -85.1,-43.6 v1(-84.7,-43.2)
USB_D_NEG: D301.4 J301.5 J301.8 U304.5 | length 15.4
  Top Layer w0.125: U304.5@-103.9,-17.1 -103.9,-16.237 -105.25,-14.887 D301.4@-105.25,-13.525 -105.25,-12.75 -105.931,-12.069 -105.931,-9.958 -104.983,-9.009 -104.983,-6.025 -104.983,-5.794 -104.923,-5.735 -104.923,-5.298 -104.725,-5.1 -103.7,-5.1 -103.475,-5.325 J301.5@-103.475,-6.025
USB_D_POS: D301.1 J301.6 J301.7 U304.4 | length 16.1
  Top Layer w0.125: J301.7@-104.475,-6.025 -104.475,-8.948 -103.35,-10.073 ; J301.6@-103.975,-6.025 -103.975,-8.75 -103.35,-9.375 -103.35,-10.073 ; U304.4@-103.4,-16.775 -103.4,-15.134 -102.669,-14.403 -102.669,-12.767 -103.35,-12.086 D301.1@-103.35,-11.225 -103.35,-10.073
USB_VBUS: D301.5 D302.2 R308.1 | length 10.4
  Top Layer w0.254: D302.2@-108.85,-14.25 -108.85,-14.652 -108.102,-15.4 v1(-107.5,-15.4) ; v1(-104.3,-14.7) D301.5@-104.3,-13.525
  Top Layer w0.5: R308.1@-109.601,-18 -109.601,-15.451 -108.85,-14.7 D302.2@-108.85,-14.652
  Bottom Layer w0.254: v1(-107.5,-15.4) -105,-15.4 v1(-104.3,-14.7)
pads on no net: AE101.3 AE101.4 AE101.5 D301.3 D301.6 J301. J301.4 J301.10 J302.15 J401.12 J401.13 J401.14 J601.6 U103.13 U201.2 U201.4 U201.11 U201.13 U201.14 U201.15 U201.Un1 U201.Un2 U202.3 U202.6 U202.7 U301.19 U301.28 U301.29 U301.30 U302.3 U303.3 U304.1 U304.2 U304.10 U304.12 U304.13 U304.14 U304.15 U304.16 U304.17 U304.18 U304.19 U304.20 U304.21 U304.22 U304.23 U304.27 U601.3 U602.5 U701.10
copper on no net: | length 25.4
  Top Layer w0.254: -150.793,-5.399 ccw(c-149.974,-7.008) -150.483,-8.741 ; -150.756,-5.323 cw(c-149.951,-3.683) -149.256,-1.993 ; -149.416,-8.746 ccw(c-149.951,-6.985) -148.947,-8.527 ; -145.4,-4.3 -139.5,-4.3 ; -145.35,-6.5 -139.45,-6.5 ; -139.502,-4.327 cw(c-139.6,-5.4) -139.454,-6.467

## Polygon pours and split planes (outlines as drawn)
GNDD on Top Layer "GNDD_L01_P008" (solid, pour order 8): -152.273,0.127 0.127,0.127 0.127,-101.473 -45.974,-101.473 -45.974,-78.74 -50.673,-74.041 -50.673,-51.562 -85.725,-51.562 -101.219,-51.562 -101.219,-101.473 -152.273,-101.473
+5V on Top Layer "+5V_L01_P000" (solid, pour order 0): -52.197,-77.089 -52.197,-80.518 -50.419,-80.518 -50.419,-77.089
GNDA on Top Layer "GNDA_L01_P006" (solid, pour order 6): -100.838,-101.473 -100.838,-52.578 -93.726,-52.578 -93.218,-52.07 -93.091,-52.197 -51.054,-52.197 -51.054,-74.295 -46.228,-79.121 -46.228,-101.473
GNDD on Bottom Layer "GNDD_L02_P004" (solid, pour order 4): -152.273,0.127 0.127,0.127 0.127,-101.473 -45.974,-101.473 -45.974,-78.74 -50.673,-74.041 -50.673,-51.562 -85.725,-51.562 -101.219,-51.562 -101.219,-101.473 -152.273,-101.473
+3.3V on Bottom Layer "+3.3V_L02_P010" (solid, pour order 10): -125.73,-58.674 -125.73,-53.467 -125.603,-53.34 -122.047,-53.34 -122.047,-58.674
GNDA on Bottom Layer "GNDA_L02_P009" (solid, pour order 9): -100.838,-101.473 -100.838,-52.578 -93.726,-52.578 -93.218,-52.07 -93.091,-52.197 -51.054,-52.197 -51.054,-74.295 -46.228,-79.121 -46.228,-101.473

## Silkscreen, mask and mechanical layers (free items; w line width, h text height)
Top Overlay:
  text "3V3" at -145.544,-3.939 h0.5
  text "5V" at -145.417,-7.241 h0.5
  text "CHECK THIS FOOTPRINT" at -82.425,-67.312 h0.5

## Text inside footprints (layer, text, board x,y; h text height)
AE101: Top Overlay "REFDES" at -52.832,-91.757 h0.5 r270; Mechanical 13 "RefDes2" at -52.832,-91.757 h0.5 r270
J301: Mechanical 13 "PCB EDGE" at -109.725,-0.175 h0.5 r180
J302: Top Overlay "1" at -51.718,-3.845 h1.27 r180; Top Overlay "2" at -51.718,-6.385 h1.27 r180; Top Overlay "19" at -77.309,-3.845 h1.27 r180; Top Overlay "20" at -77.309,-6.385 h1.27 r180; Top Overlay "REFDES" at -62.767,-5.115 h1.27 r180; Mechanical 13 "1" at -51.718,-3.845 h1.27 r180; Mechanical 13 "2" at -51.718,-6.385 h1.27 r180; Mechanical 13 "19" at -77.309,-3.845 h1.27 r180; Mechanical 13 "20" at -77.309,-6.385 h1.27 r180; Mechanical 13 "RefDes2" at -62.767,-5.115 h1.27 r180; Bottom Overlay "1" at -52.353,-3.845 h1.27 r180; Bottom Overlay "2" at -52.353,-6.385 h1.27 r180; Bottom Overlay "19" at -78.579,-3.845 h1.27 r180; Bottom Overlay "20" at -78.579,-6.385 h1.27 r180
J401: Top Overlay "E32-433T33D" at -135.141,-41.185 h0.5 r90
U101: Mechanical 10 "REF**" at -114.158,-78.006 h0.5 r90
U102: Mechanical 10 "REF**" at -137.653,-78.133 h0.5 r90
U301: Top Overlay "*" at -82.852,-25.765 h0.5; Top Overlay "REFDES" at -74.622,-31.025 h0.5; Mechanical 13 "*" at -80.083,-25.765 h0.5; Mechanical 13 "RefDes2" at -74.622,-31.025 h0.5
U302: Top Overlay "REFDES" at -121.835,-10.178 h0.5 r270; Mechanical 13 "RefDes2" at -121.835,-10.178 h0.5 r270
U303: Top Overlay "REFDES" at -116.735,-10.078 h0.5 r270; Mechanical 13 "RefDes2" at -116.735,-10.078 h0.5 r270
Y601: Top Overlay "REFDES" at -47.752,-62.293 h0.5 r270; Mechanical 13 "RefDes2" at -47.752,-62.293 h0.5 r270